# Altium PCB Low Distortion Oscillator.PcbDoc
Units mil, origin at the board's own origin, x right, y up, seen from the top; angles counter-clockwise.
Board outline 3937.01 x 3937.01 mil, 4 copper layers (Top Layer, Ground Plane, Power Plane, Bottom Layer), stack 62.449 mil thick; 6 components, 14 nets, 84 pads, 0 vias.
Unrouted connection lines stored in the file: 32.
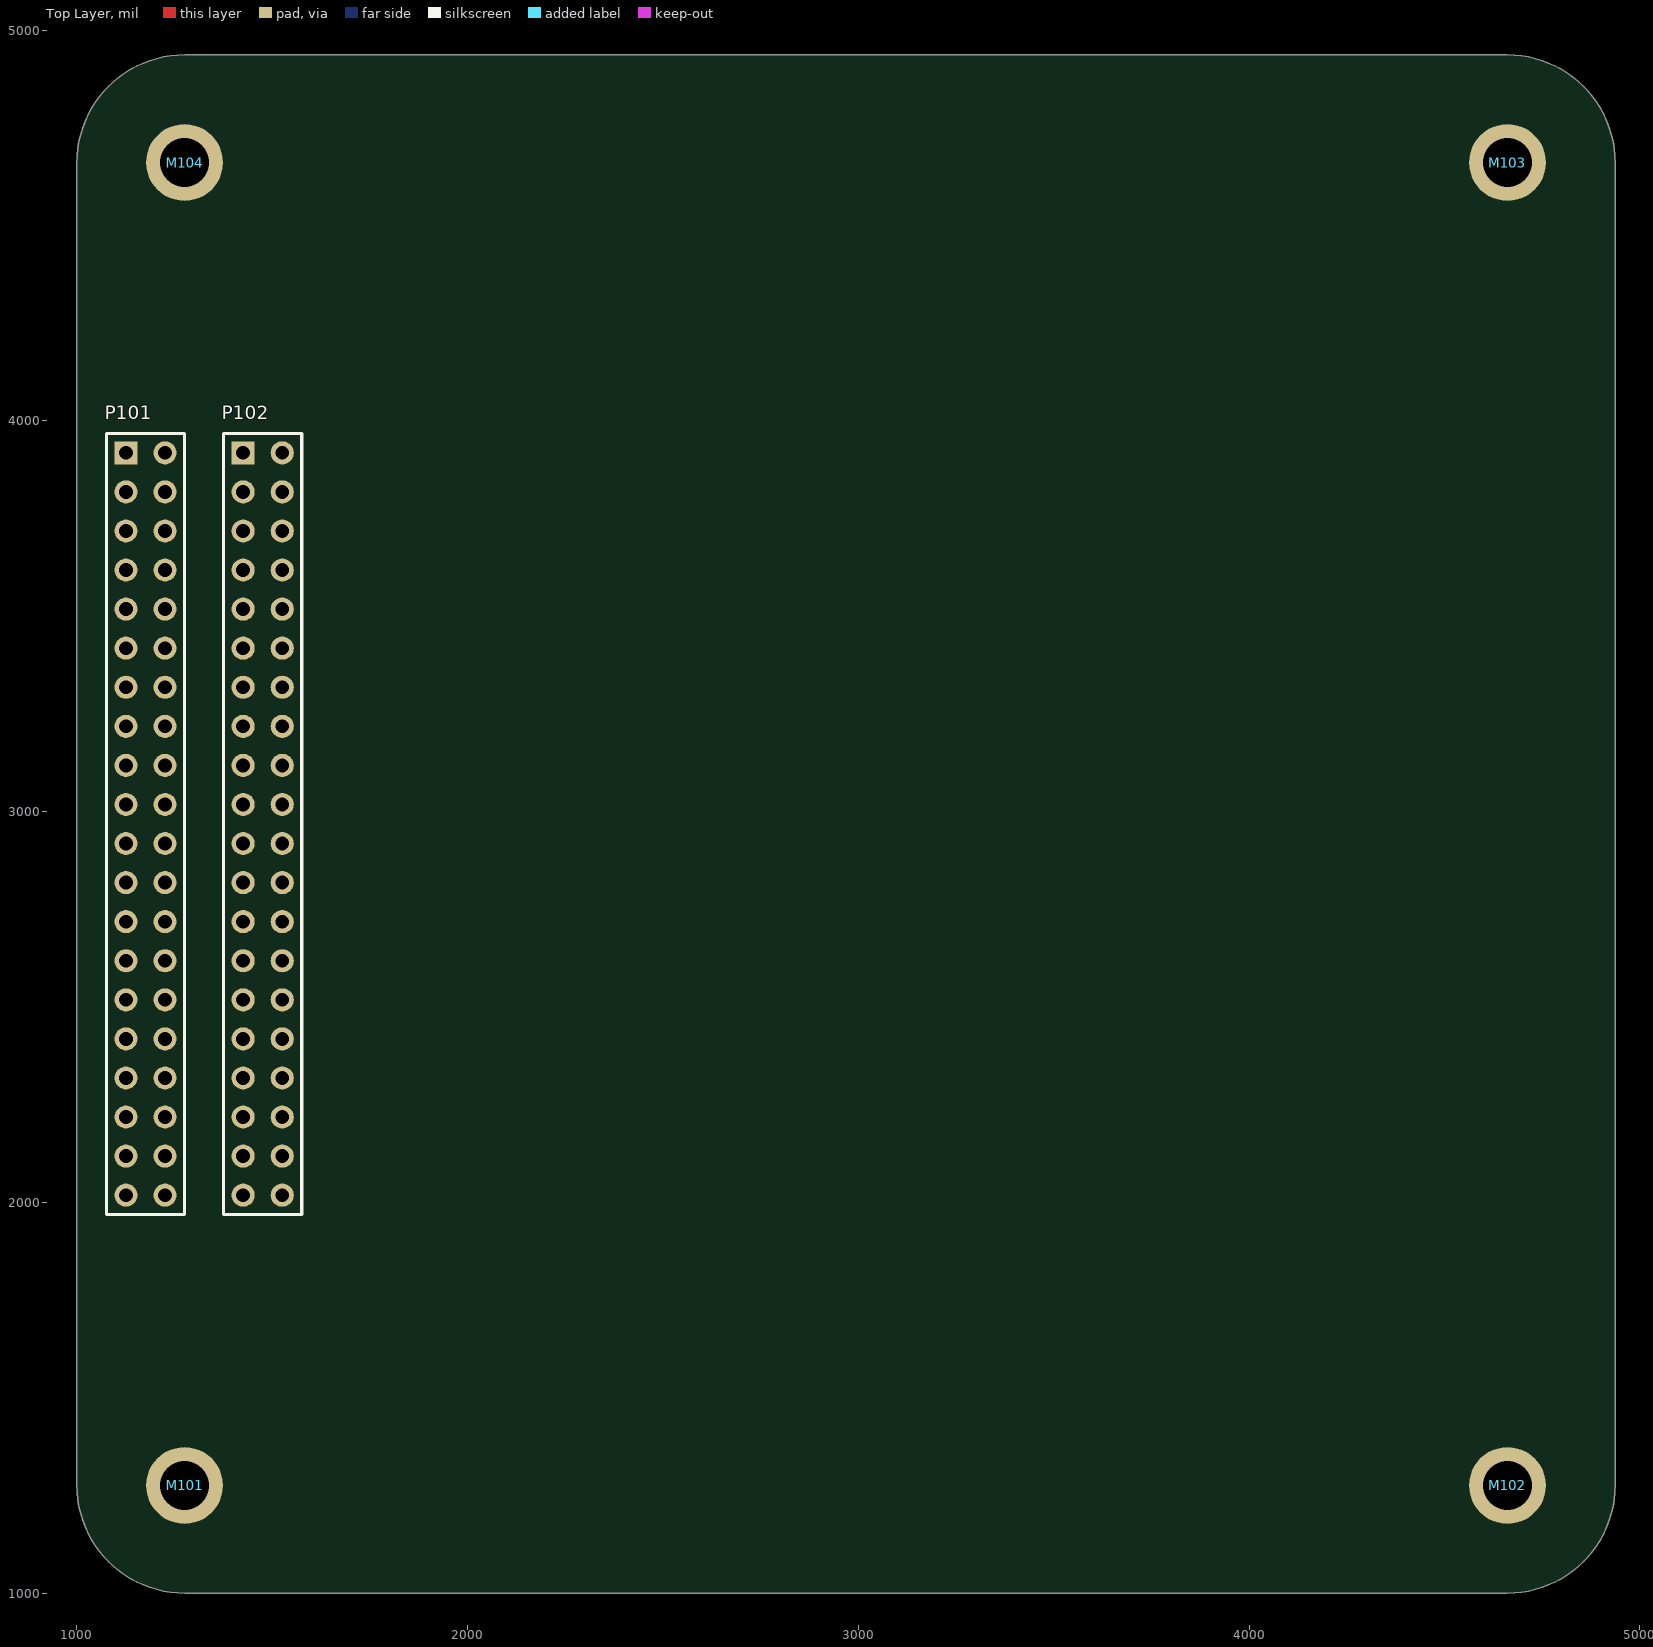
[diagram p0: Top Layer view]
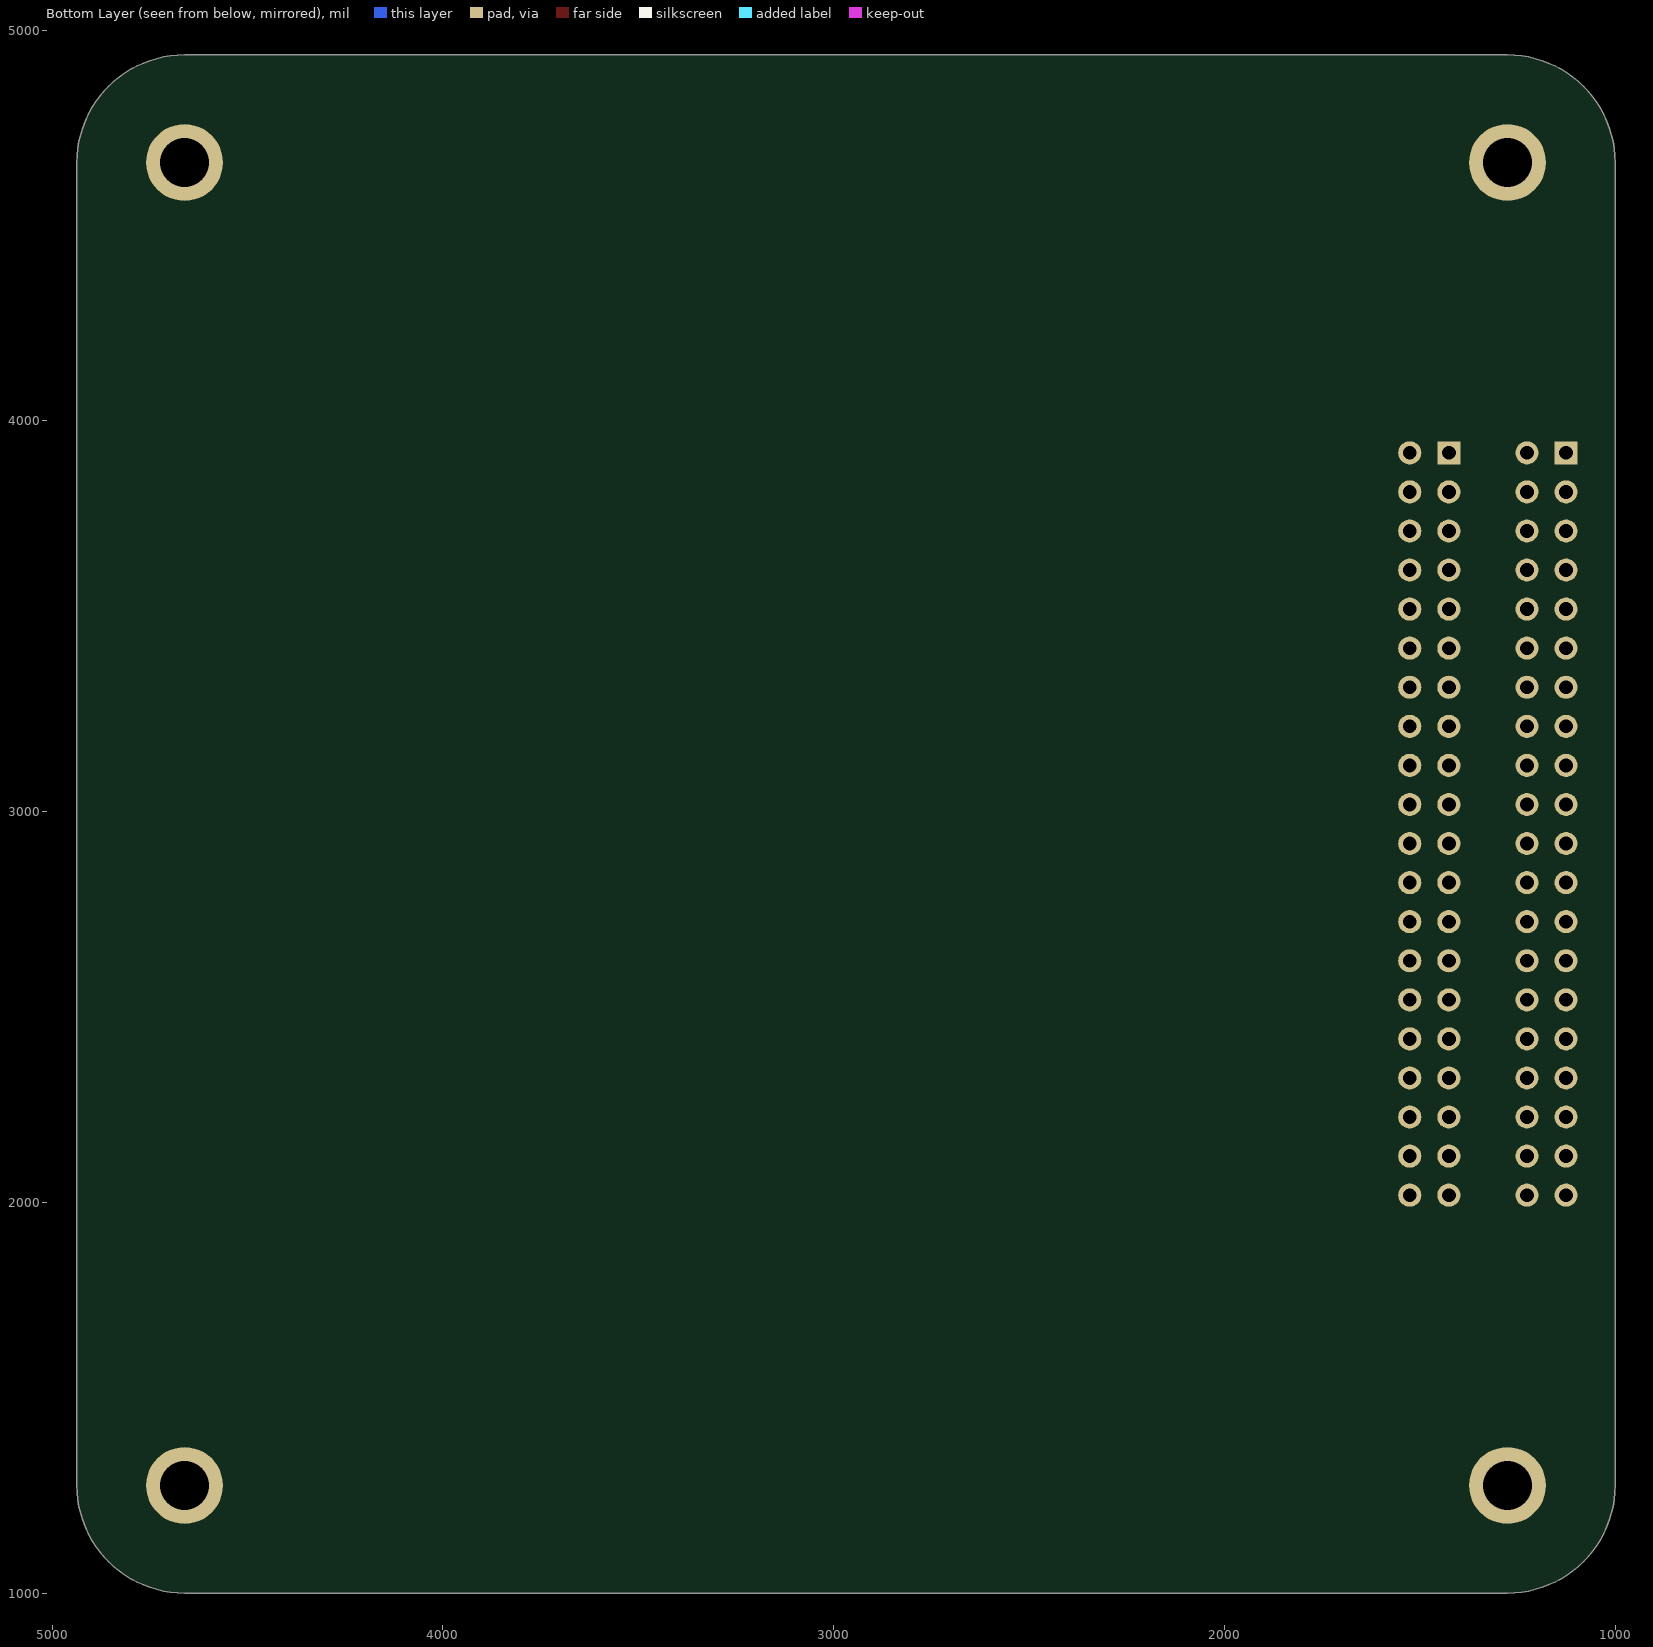
[diagram p1: Bottom Layer view, seen from below]
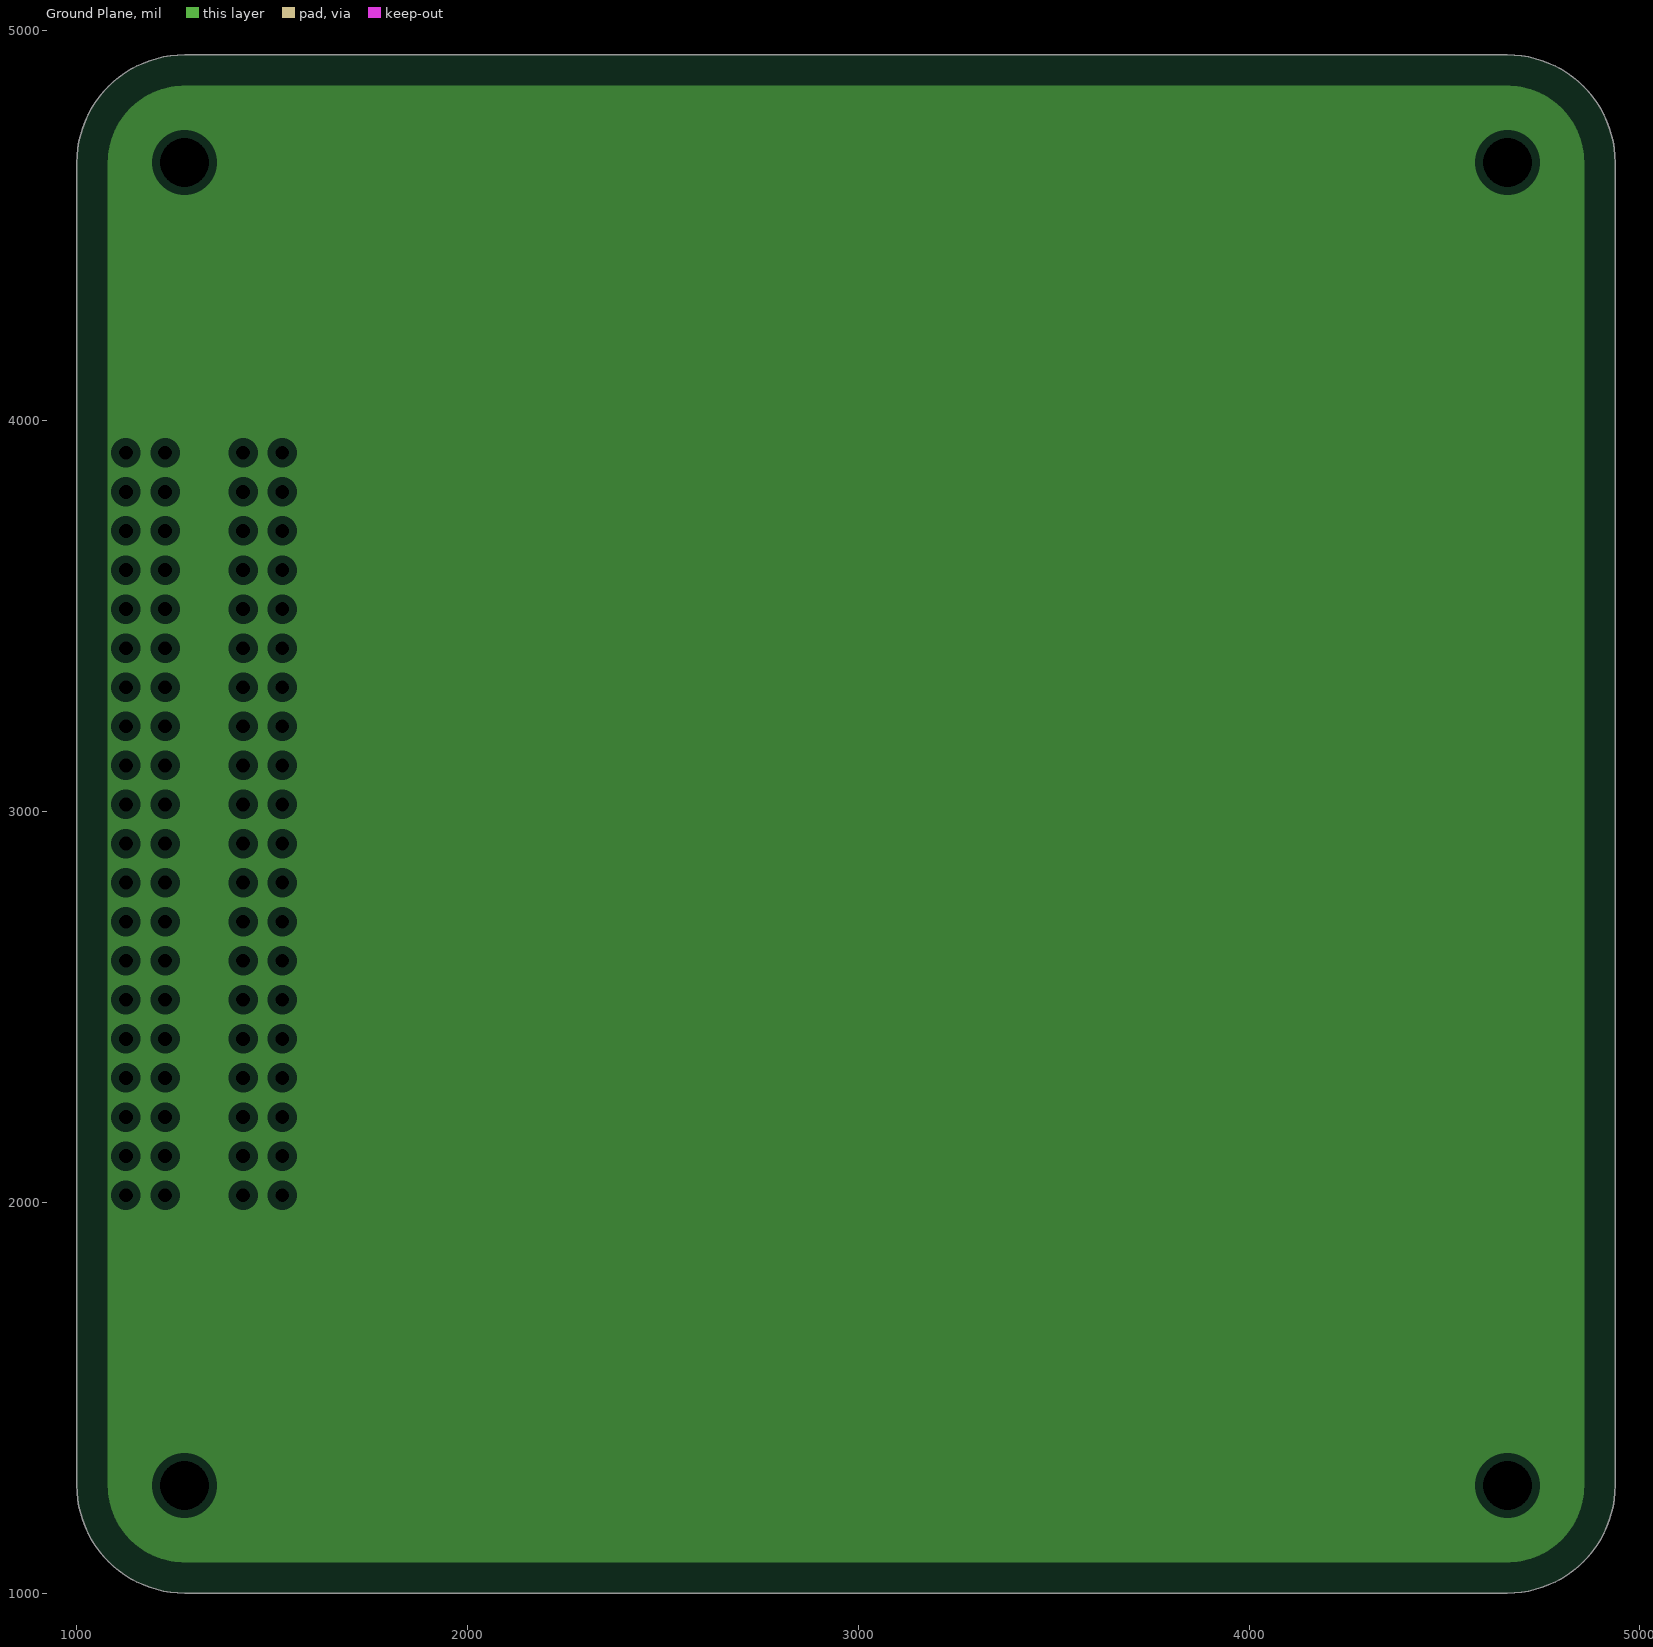
[diagram p2: Ground Plane, clearances drawn from the general rule]
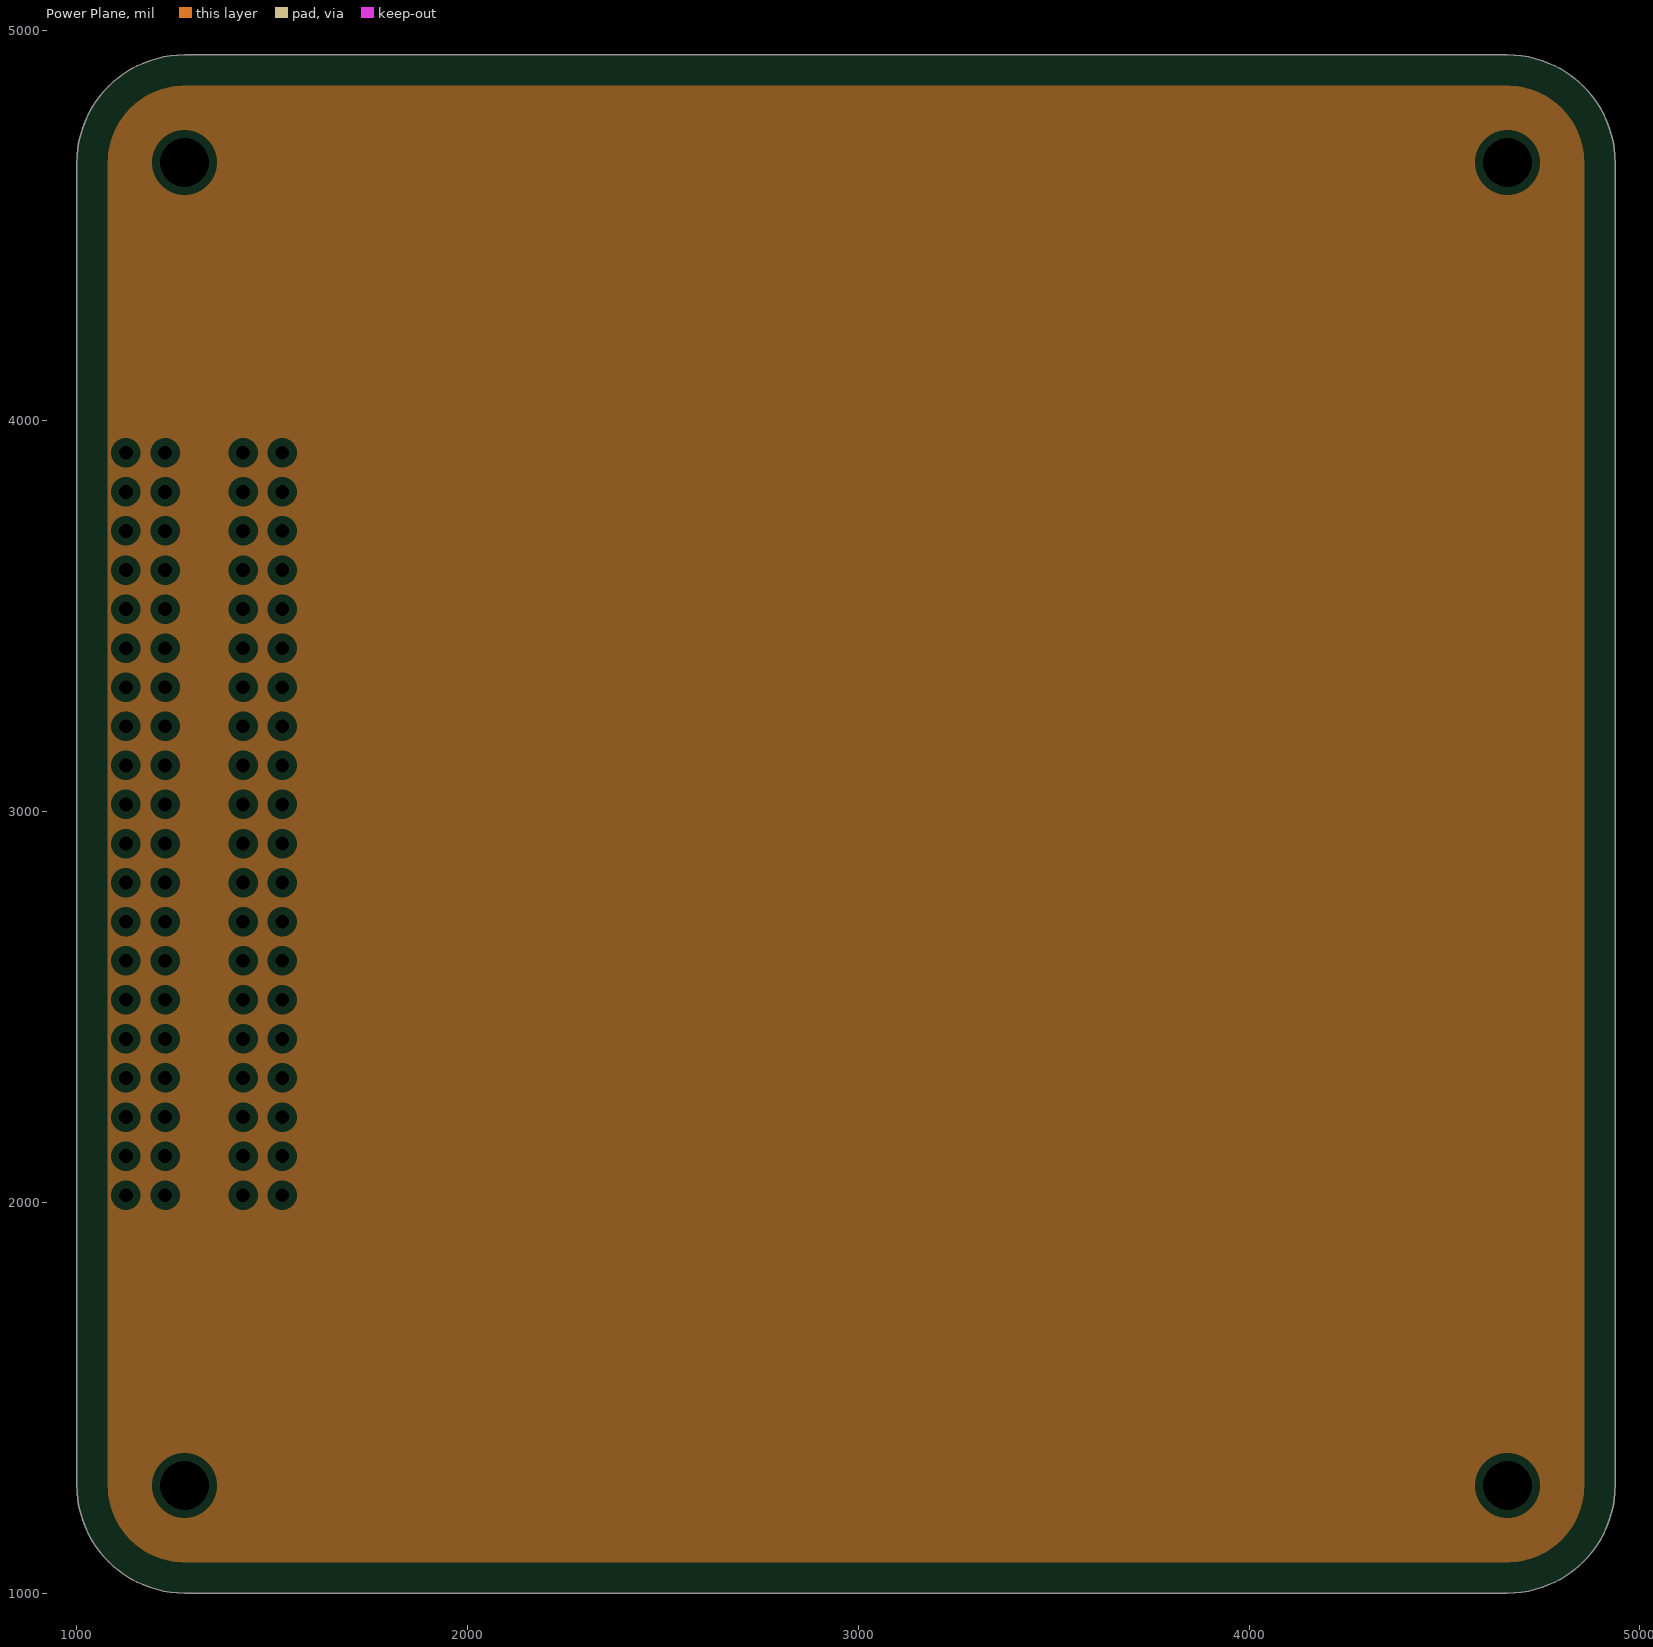
[diagram p3: Power Plane, clearances drawn from the general rule]

## Layer stack, top to bottom
Top Solder: solder mask 0.5, Solder Resist, Dk 3.8
Top Layer: signal copper 1.378
Dielectric 1: prepreg 8.284, 7628, Dk 4.5
Ground Plane: plane copper 0.598
Dielectric 3: core 41.929, FR-4, Dk 4.5
Power Plane: plane copper 0.598
Dielectric 4: prepreg 8.284, 7628, Dk 4.5
Bottom Layer: signal copper 1.378
Bottom Solder: solder mask 0.5, Solder Resist, Dk 3.8

## Board outline
1275.59,1000 cw(c1275.59,1275.59) 1000,1275.59 1000,4661.42 cw(c1275.59,4661.42) 1275.59,4937.01 4661.42,4937.01 cw(c4661.42,4661.42) 4937.01,4661.42 4937.01,1275.59 cw(c4661.42,1275.59) 4661.42,1000

## Design rules (kind name [scope] priority, off if disabled: settings)
Clearance [All] p1: gap=10 ignorepadtopadclearanceinfootprint=FALSE except(0: Arc-Hole Track-Hole SMDPad-Hole THPad-Hole Via-Hole Fill-Hole Poly-Hole Region-Hole Text-Hole)
PlaneClearance [All] p1: clearance=20
PlaneConnect [All] p1: planeconnectstyle=Relief reliefexpansion=20 reliefentries=4 reliefconductorwidth=10 reliefairgap=10
PolygonConnect [All] p1: connectstyle=Relief reliefconductorwidth=10 reliefentries=4 polygonreliefangle="90 Angle" airgapwidth=10
RoutingVias [All] p1: holewidth=28 width=50 viastyle="Through Hole" minholewidth=28 minwidth=50 maxholewidth=28 maxwidth=50
SolderMaskExpansion [All] p1: expansion=4
Width [All] p1: maxlimit=10 minlimit=10 preferedwidth=10
28 further rules are at their usual default settings.

## Components (designator, comment, footprint, x,y, rotation, side; value= is the part's Value field where it differs from the comment)
M101 "M3" M3-3.2X5 1275.59,1275.59 r0 top
M102 "M3" M3-3.2X5 4661.42,1275.59 r0 top
M103 "M3" M3-3.2X5 4661.42,4661.42 r0 top
M104 "M3" M3-3.2X5 1275.59,4661.42 r0 top
P101 "Header 20X2" PC/104-2X20 1125.59,3918.5 r0 top locked
P102 "Header 20X2" PC/104-2X20 1425.59,3918.5 r0 top locked

## Footprints (in the part's own frame and the unit in brackets; to place one, negate y for a bottom-side part, rotate by r counter-clockwise, add the part's x,y. Pads: shape width x height; smd on the part's side, far side on the other; paste and mask are expansions set on the pad)
M3-3.2X5 [mm]
  round 5 hole 3.2: ""(0,0)
PC/104-2X20 [mm] "Connector; Female Header; 20x2 Position"
  rect 1.5x1.5 hole 0.9: 1(0,0)
  round 1.5 hole 0.9: 2(2.54,0) 3(0,-2.54) 4(2.54,-2.54) 5(0,-5.08) 6(2.54,-5.08) 7(0,-7.62) 8(2.54,-7.62) 9(0,-10.16) 10(2.54,-10.16) 11(0,-12.7) 12(2.54,-12.7) 13(0,-15.24) 14(2.54,-15.24) 15(0,-17.78) 16(2.54,-17.78) 17(0,-20.32) 18(2.54,-20.32) 19(0,-22.86) 20(2.54,-22.86) 21(0,-25.4) 22(2.54,-25.4) 23(0,-27.94) 24(2.54,-27.94) 25(0,-30.48) 26(2.54,-30.48) 27(0,-33.02) 28(2.54,-33.02) 29(0,-35.56) 30(2.54,-35.56) 31(0,-38.1) 32(2.54,-38.1) 33(0,-40.64) 34(2.54,-40.64) 35(0,-43.18) 36(2.54,-43.18) 37(0,-45.72) 38(2.54,-45.72) 39(0,-48.26) 40(2.54,-48.26)
  silkscreen extent -1.27,-49.53 3.81,1.27, body extent -1.27,-49.78 3.81,1.52, height 11.05

## Part data
P101 P102: "Header, 20-Pin, Dual row"

## Nets (pads, with @x,y where several pads share a name; then routed paths per layer and width w, separated by ;. In a path a pad name is that pad's centre, name@x,y a point inside that pad or via, vN(x,y) a via of type N, cw(c..) or ccw(c..) an arc to the next point about the centre after c; other vN are vias at no path point)
DC24V: P101.25 P101.26
DC+3V3: P101.37 P101.38
DC+6V5: P101.33 P101.34
DC+18V: P101.1 P101.2
DC+19V5: P101.17 P101.18
DC-18V: P101.5 P101.6
DC-19V5: P101.21 P101.22
GND: P101.3 P101.4 P101.7 P101.8 P101.11 P101.12 P101.15 P101.16 P101.19 P101.20 P101.23 P101.24 P101.27 P101.28 P101.31 P101.32 P101.35 P101.36 P101.39 P101.40 P102.1 P102.2 P102.21 P102.22 P102.39 P102.40
PWREXT1: P101.9
PWREXT2: P101.10
PWREXT3: P101.13
PWREXT4: P101.14
PWREXT5: P101.29
PWREXT6: P101.30
pads on no net: M101. M102. M103. M104. P102.3 P102.4 P102.5 P102.6 P102.7 P102.8 P102.9 P102.10 P102.11 P102.12 P102.13 P102.14 P102.15 P102.16 P102.17 P102.18 P102.19 P102.20 P102.23 P102.24 P102.25 P102.26 P102.27 P102.28 P102.29 P102.30 P102.31 P102.32 P102.33 P102.34 P102.35 P102.36 P102.37 P102.38

## Polygon pours and split planes (outlines as drawn)
no net on Ground Plane (split plane): 4673.3,4857.9 4685.14,4856.82 4696.9,4855.03 4708.52,4852.54 4719.98,4849.34 4731.22,4845.47 4742.2,4840.92 4752.89,4835.71 4763.25,4829.87 4773.24,4823.41 4782.81,4816.37 4791.95,4808.75 4800.6,4800.6 4808.75,4791.95 4816.37,4782.81 4823.41,4773.24 4829.87,4763.25 4835.71,4752.89 4840.92,4742.2 4845.47,4731.22 4849.34,4719.98 4852.54,4708.52 4855.03,4696.9 4856.82,4685.14 4857.9,4673.3 4858.23,4662.49 4858.17,4661.42 4858.17,1275.59 4858.23,1274.52 4857.9,1263.71 4856.82,1251.86 4855.03,1240.11 4852.54,1228.48 4849.34,1217.03 4845.47,1205.79 4840.92,1194.8 4835.71,1184.11 4829.87,1173.76 4823.41,1163.77 4816.37,1154.2 4808.75,1145.06 4800.6,1136.4 4791.95,1128.25 4782.81,1120.64 4773.24,1113.59 4763.25,1107.14 4752.89,1101.3 4742.2,1096.09 4731.22,1091.54 4719.98,1087.66 4708.52,1084.47 4696.9,1081.97 4685.14,1080.19 4673.3,1079.11 4662.49,1078.78 4661.42,1078.84 1275.59,1078.84 1274.52,1078.78 1263.71,1079.11 1251.86,1080.19 1240.11,1081.97 1228.48,1084.47 1217.03,1087.66 1205.79,1091.54 1194.8,1096.09 1184.11,1101.3 1173.76,1107.14 1163.77,1113.59 1154.2,1120.64 1145.06,1128.25 1136.4,1136.4 1128.25,1145.06 1120.64,1154.2 1113.59,1163.77 1107.14,1173.76 1101.3,1184.11 1096.09,1194.8 1091.54,1205.79 1087.66,1217.03 1084.47,1228.48 1081.97,1240.11 1080.19,1251.86 1079.11,1263.71 1078.78,1274.52 1078.84,1275.59 1078.84,4661.42 1078.78,4662.49 1079.11,4673.3 1080.19,4685.14 1081.97,4696.9 1084.47,4708.52 1087.66,4719.98 1091.54,4731.22 1096.09,4742.2 1101.3,4752.89 1107.14,4763.25 1113.59,4773.24 1120.64,4782.81 1128.25,4791.95 1136.4,4800.6 1145.06,4808.75 1154.2,4816.37 1163.77,4823.41 1173.76,4829.87 1184.11,4835.71 1194.8,4840.92 1205.79,4845.47 1217.03,4849.34 1228.48,4852.54 1240.11,4855.03 1251.86,4856.82 1263.71,4857.9 1274.52,4858.23 1275.59,4858.17 4661.42,4858.17 4662.49,4858.23
no net on Power Plane (split plane): 4673.3,4857.9 4685.14,4856.82 4696.9,4855.03 4708.52,4852.54 4719.98,4849.34 4731.22,4845.47 4742.2,4840.92 4752.89,4835.71 4763.25,4829.87 4773.24,4823.41 4782.81,4816.37 4791.95,4808.75 4800.6,4800.6 4808.75,4791.95 4816.37,4782.81 4823.41,4773.24 4829.87,4763.25 4835.71,4752.89 4840.92,4742.2 4845.47,4731.22 4849.34,4719.98 4852.54,4708.52 4855.03,4696.9 4856.82,4685.14 4857.9,4673.3 4858.23,4662.49 4858.17,4661.42 4858.17,1275.59 4858.23,1274.52 4857.9,1263.71 4856.82,1251.86 4855.03,1240.11 4852.54,1228.48 4849.34,1217.03 4845.47,1205.79 4840.92,1194.8 4835.71,1184.11 4829.87,1173.76 4823.41,1163.77 4816.37,1154.2 4808.75,1145.06 4800.6,1136.4 4791.95,1128.25 4782.81,1120.64 4773.24,1113.59 4763.25,1107.14 4752.89,1101.3 4742.2,1096.09 4731.22,1091.54 4719.98,1087.66 4708.52,1084.47 4696.9,1081.97 4685.14,1080.19 4673.3,1079.11 4662.49,1078.78 4661.42,1078.84 1275.59,1078.84 1274.52,1078.78 1263.71,1079.11 1251.86,1080.19 1240.11,1081.97 1228.48,1084.47 1217.03,1087.66 1205.79,1091.54 1194.8,1096.09 1184.11,1101.3 1173.76,1107.14 1163.77,1113.59 1154.2,1120.64 1145.06,1128.25 1136.4,1136.4 1128.25,1145.06 1120.64,1154.2 1113.59,1163.77 1107.14,1173.76 1101.3,1184.11 1096.09,1194.8 1091.54,1205.79 1087.66,1217.03 1084.47,1228.48 1081.97,1240.11 1080.19,1251.86 1079.11,1263.71 1078.78,1274.52 1078.84,1275.59 1078.84,4661.42 1078.78,4662.49 1079.11,4673.3 1080.19,4685.14 1081.97,4696.9 1084.47,4708.52 1087.66,4719.98 1091.54,4731.22 1096.09,4742.2 1101.3,4752.89 1107.14,4763.25 1113.59,4773.24 1120.64,4782.81 1128.25,4791.95 1136.4,4800.6 1145.06,4808.75 1154.2,4816.37 1163.77,4823.41 1173.76,4829.87 1184.11,4835.71 1194.8,4840.92 1205.79,4845.47 1217.03,4849.34 1228.48,4852.54 1240.11,4855.03 1251.86,4856.82 1263.71,4857.9 1274.52,4858.23 1275.59,4858.17 4661.42,4858.17 4662.49,4858.23

## Silkscreen, mask and mechanical layers (free items; w line width, h text height)
Mechanical 1:
  the board outline again, w10